# Altium PCB dev-board.PcbDoc (part 1 of 2)
Units mil, origin at the board's own origin, x right, y up, seen from the top; angles counter-clockwise.
Board outline 5607.36 x 5449.25 mil, 4 copper layers (Top Layer, Mid Layer 1, Mid Layer 2, Bottom Layer), stack 62.449 mil thick; 258 components, 114 nets, 705 pads, 139 vias.
Unrouted connection lines stored in the file: 225.
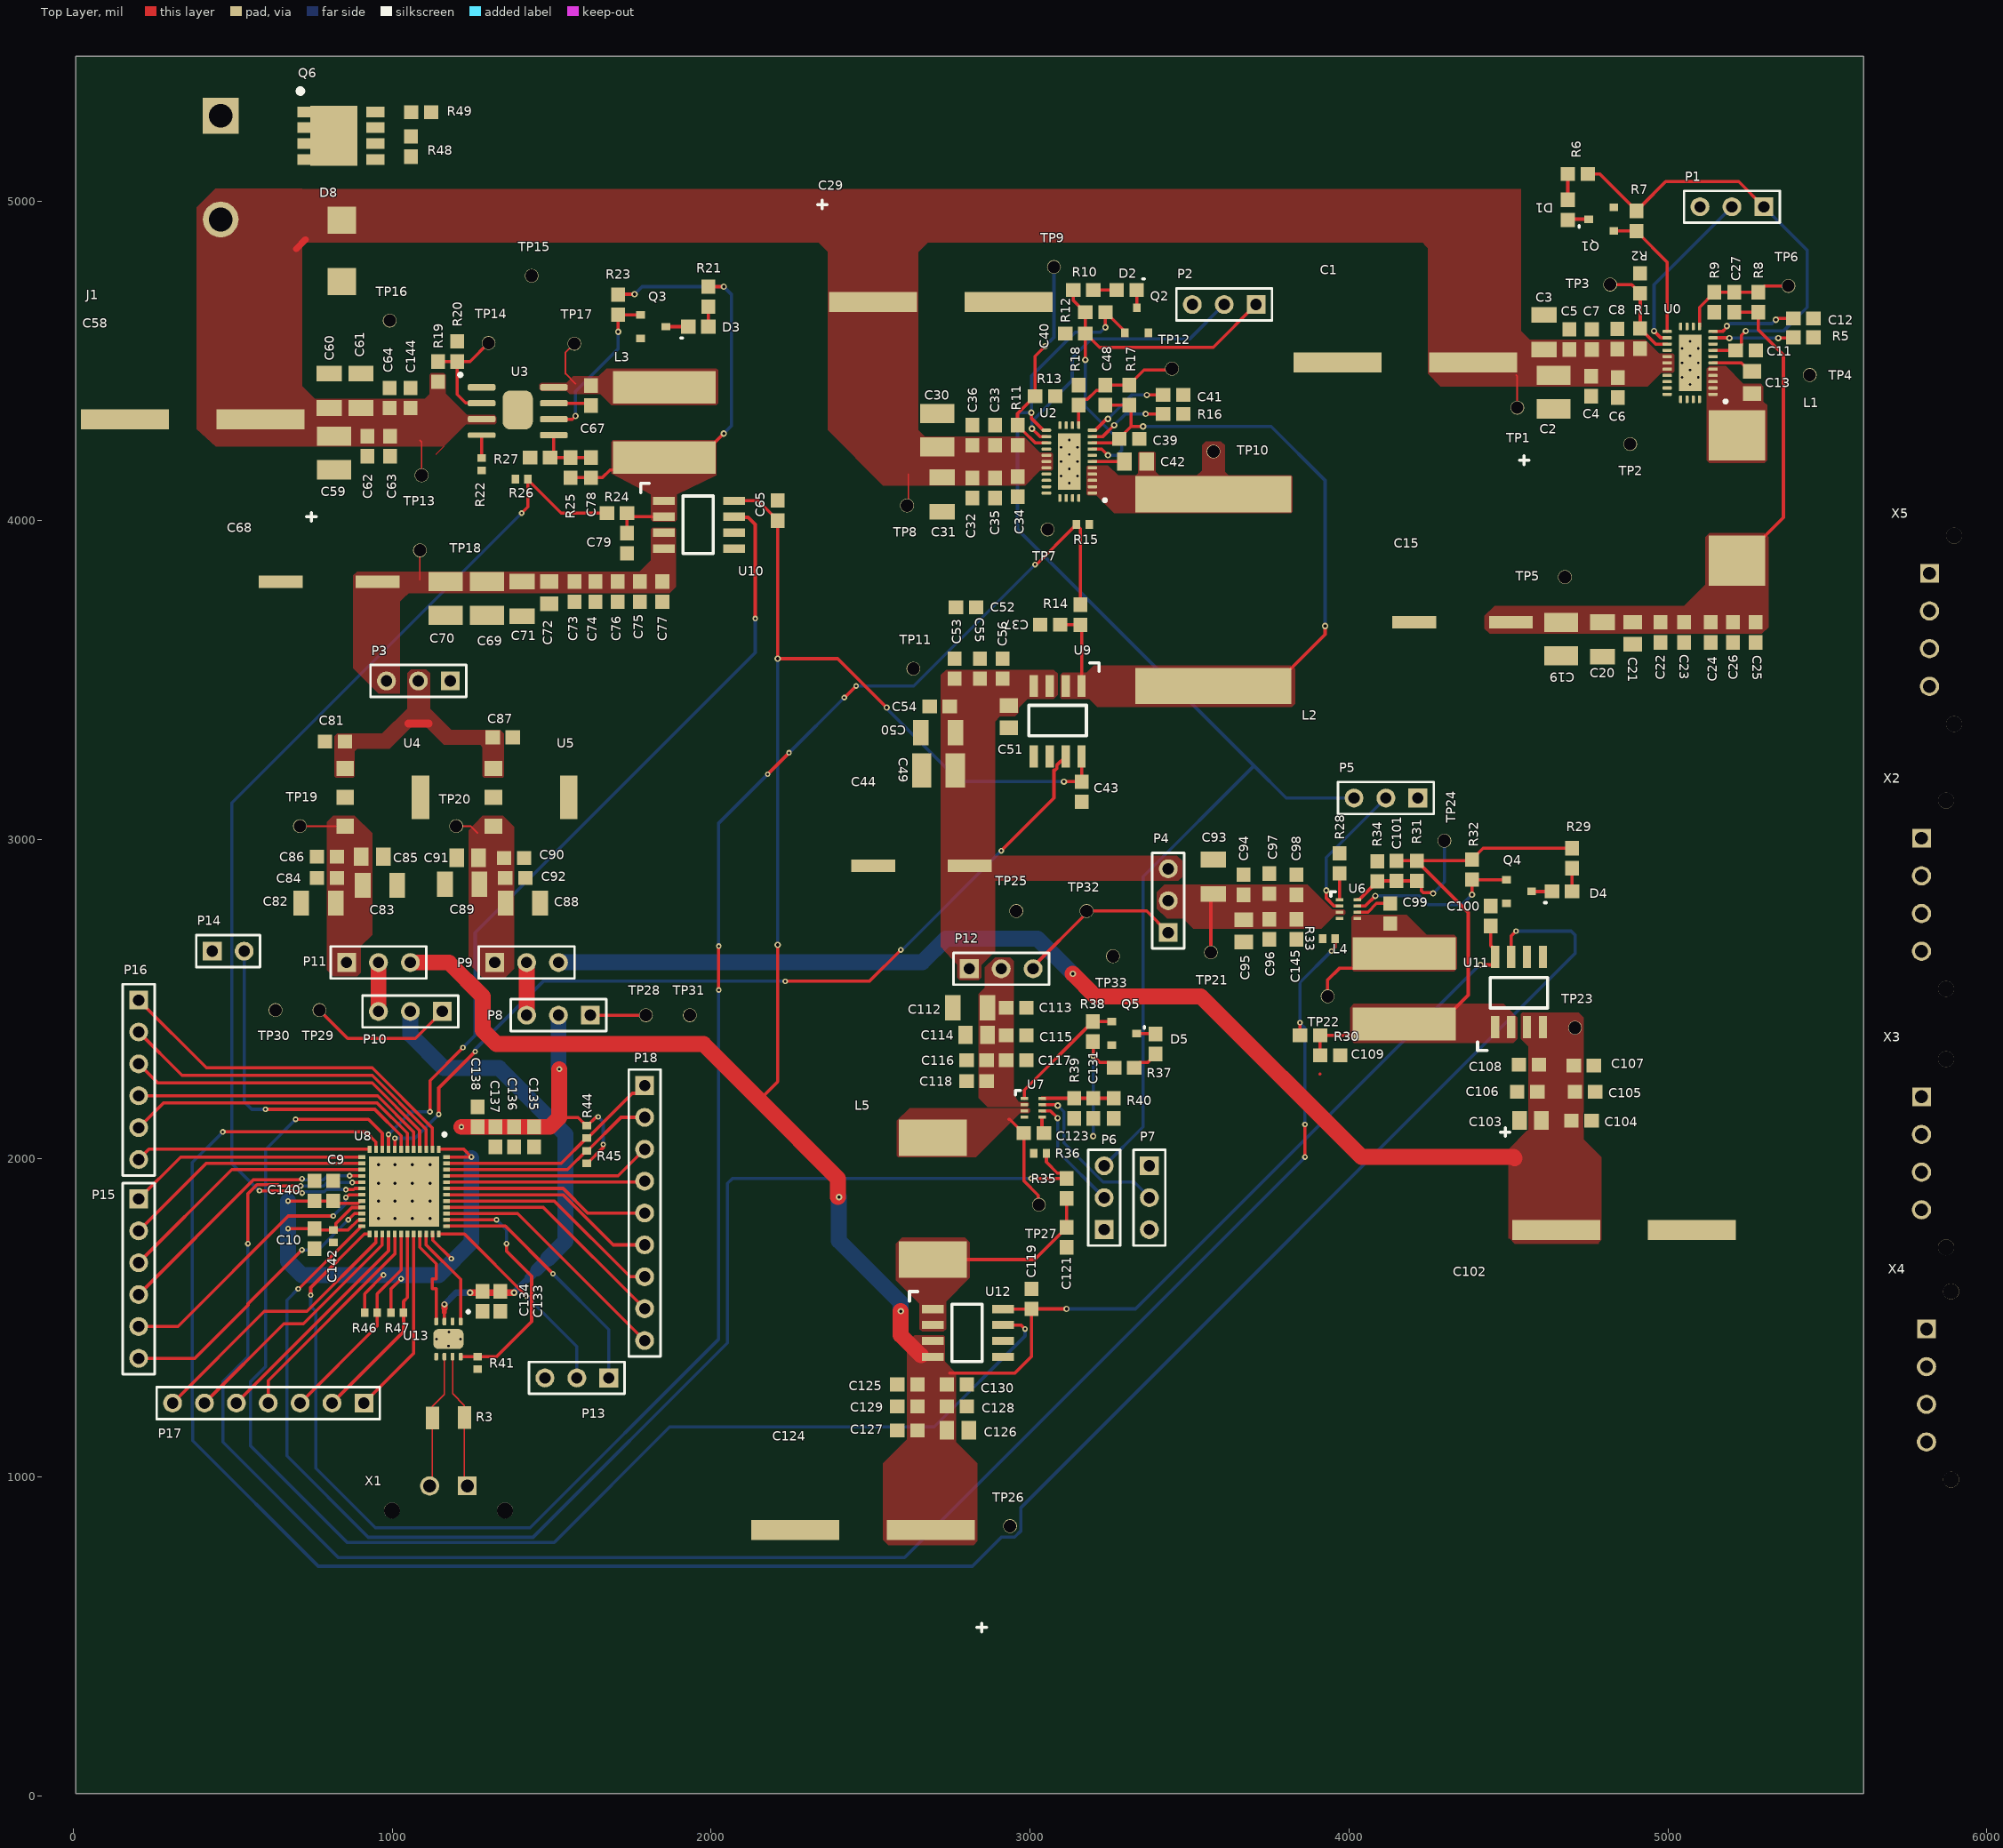
[diagram p0: Top Layer view]
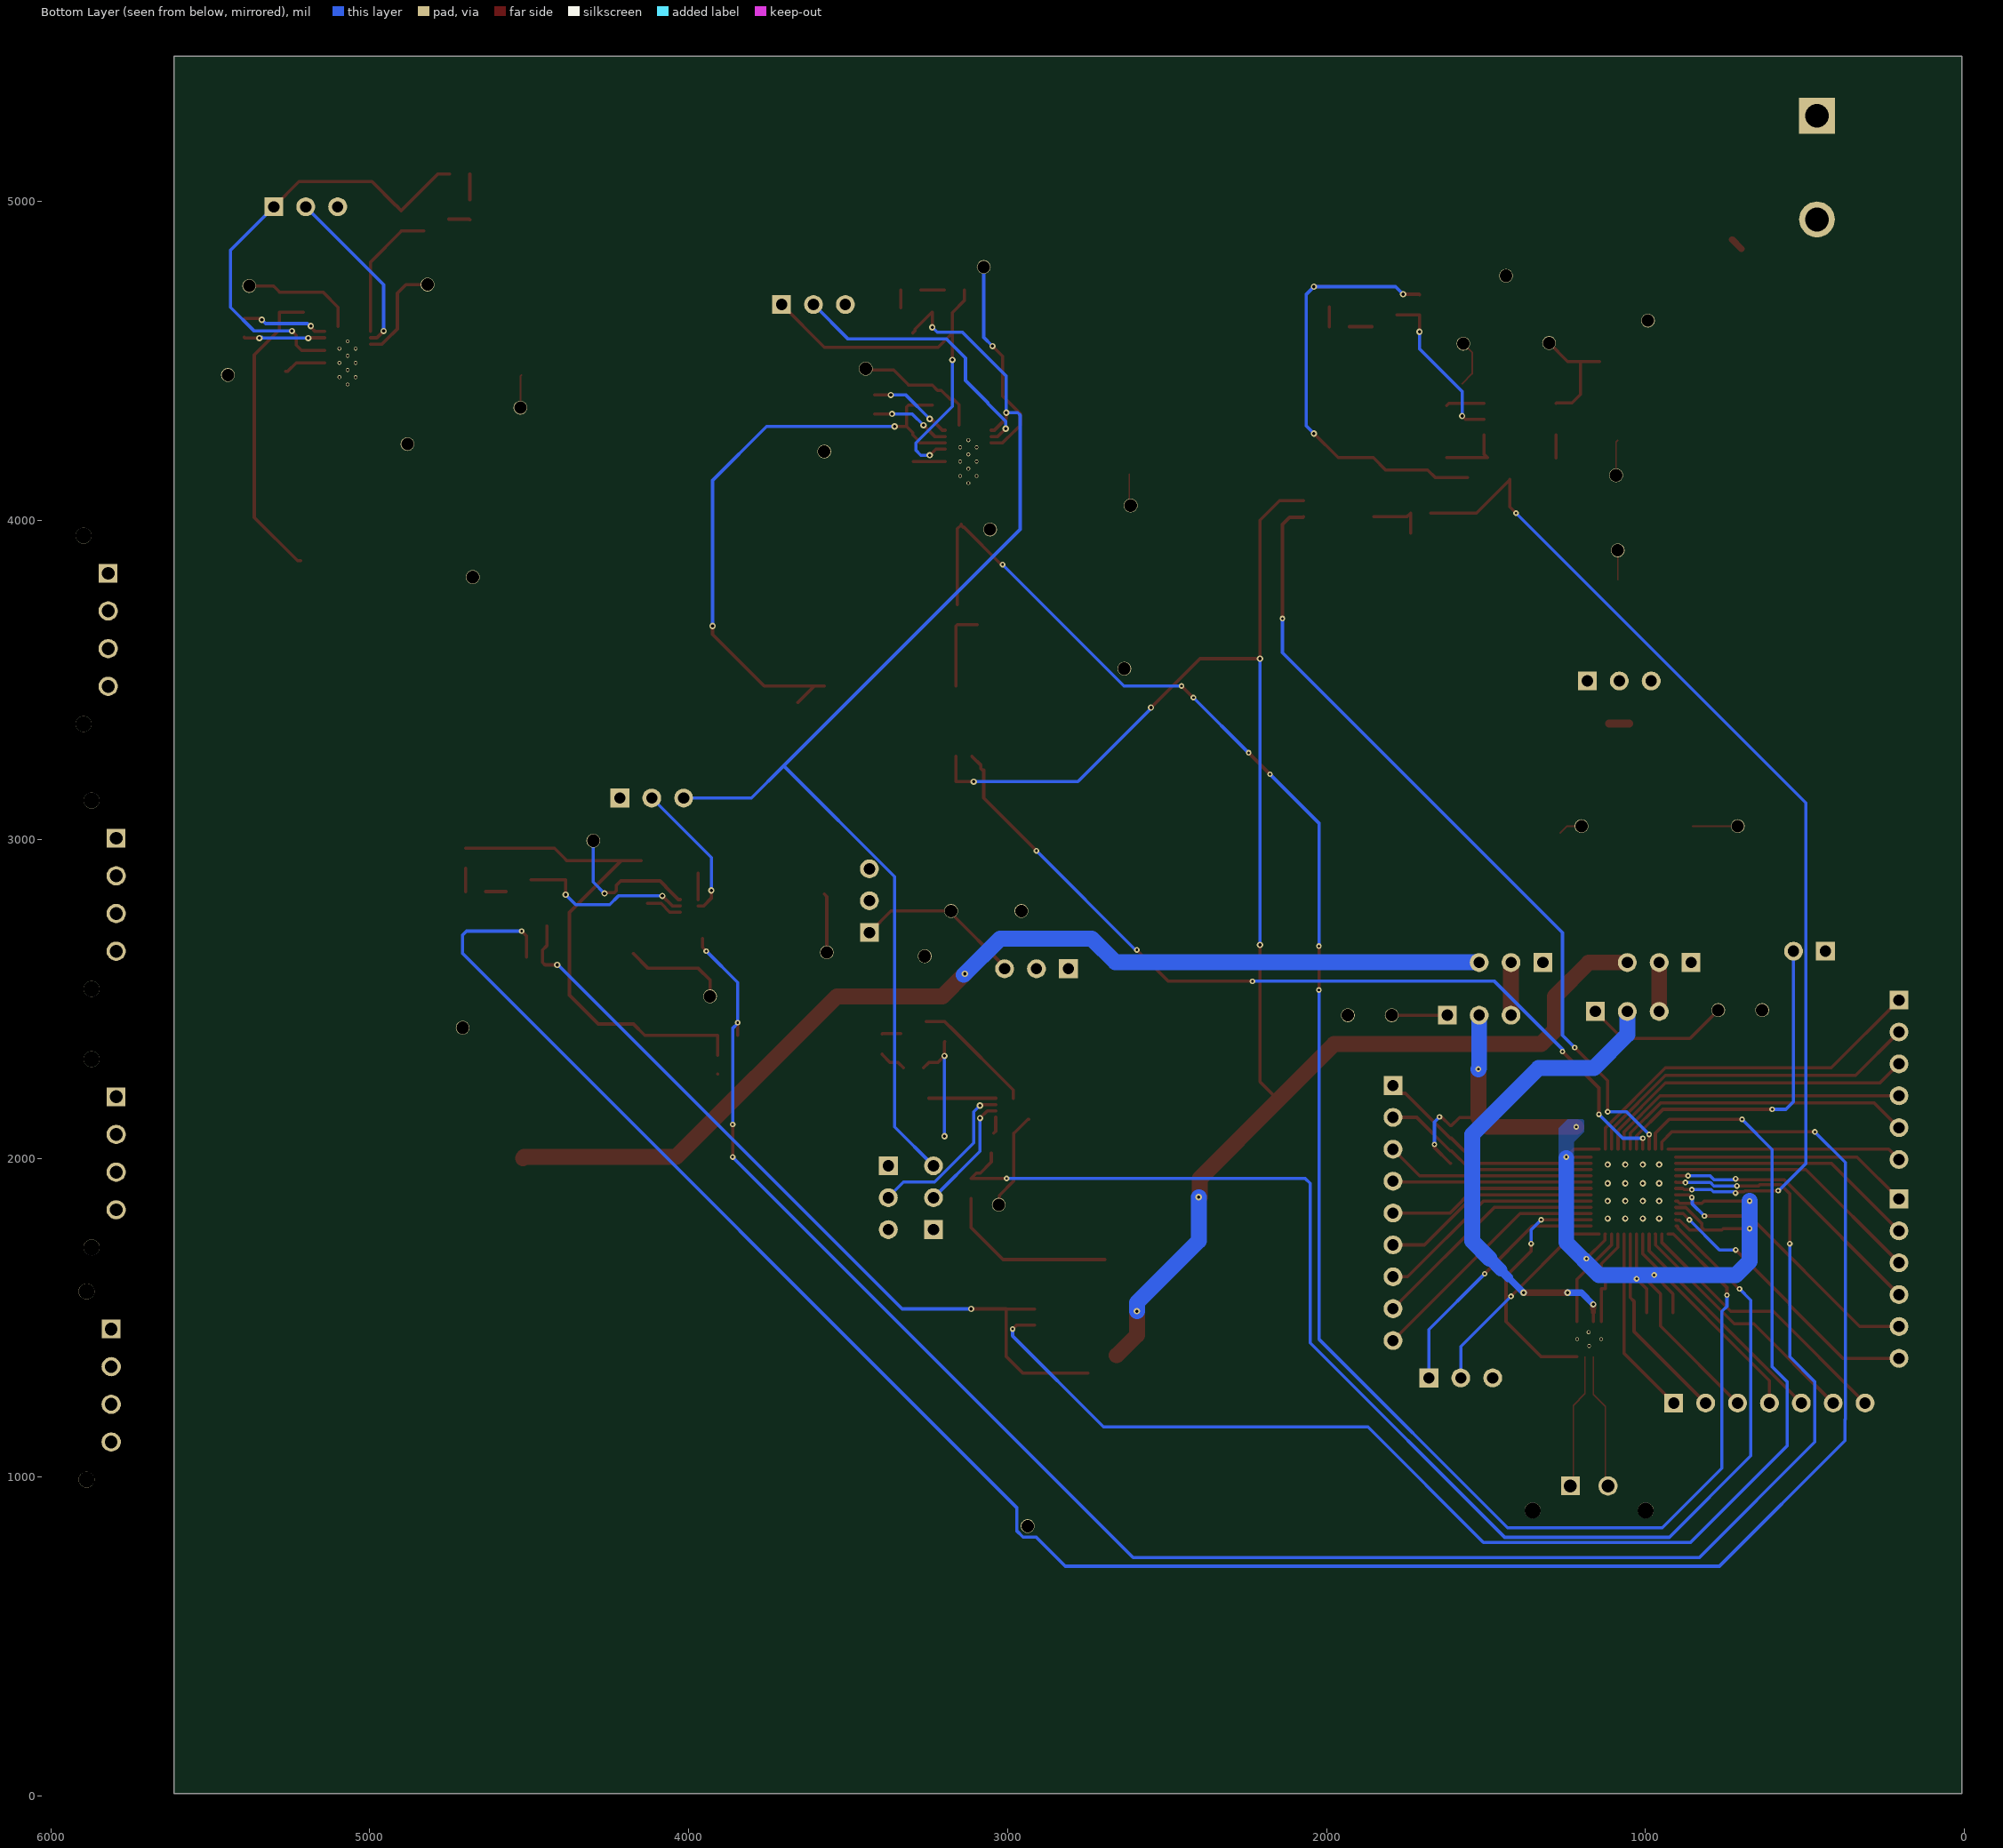
[diagram p1: Bottom Layer view, seen from below]

## Layer stack, top to bottom
Top Solder: solder mask 0.5, Solder Resist, Dk 3.8
Top Layer: signal copper 1.378
Dielectric 1: prepreg 8.2835, 7628, Dk 4.4
Mid Layer 1: signal copper 0.5984
Core: core 41.9291, FR-4, Dk 4.6
Mid Layer 2: signal copper 0.5984
Dielectric 2: prepreg 8.2835, 7628, Dk 4.4
Bottom Layer: signal copper 1.378
Bottom Solder: solder mask 0.5, Solder Resist, Dk 3.8

## Board outline
6.81,7.87 5614.17,7.87 5614.17,5457.13 6.81,5457.13

## Design rules (kind name [scope] priority, off if disabled: settings)
BoardOutlineClearance [All] p1: gap=7.87 ignorepadtopadclearanceinfootprint=FALSE
Clearance [All] p1: gap=4 ignorepadtopadclearanceinfootprint=FALSE except(5: Arc-Via Track-Via SMDPad-Via THPad-Via Via-Via Via-Fill Via-Poly Via-Region Via-Text; 9.84: Arc-Hole Track-Hole SMDPad-Hole THPad-Hole Via-Hole Fill-Hole Poly-Hole Region-Hole Text-Hole)
ComponentClearance [All] p1: gap=4 collisioncheckmode=3 verticalgap=4 showdistances=TRUE
DiffPairsRouting [All] p1: maxlimit=5 minlimit=5 mostfreqgap=5 toplayer_minwidth=3.72 toplayer_maxwidth=3.72 toplayer_prefwidth=3.72 midlayer1_minwidth=2.23 midlayer1_maxwidth=2.23 midlayer1_prefwidth=2.23 midlayer2_minwidth=2.23 midlayer2_maxwidth=2.23 midlayer2_prefwidth=2.23 bottomlayer_minwidth=3.72 bottomlayer_maxwidth=3.72 bottomlayer_prefwidth=3.72 impedanceprofiledriven=TRUE impedanceprofileid={BC63E812-B915-45A8-AD66-7DECBE9AC726} impedanceprofilevalue=120.000000 maxuncoupledlength=500
Height [All] p1: minheight=0 maxheight=71497.94 prefheight=500
HoleSize [All] p1: absolutevalues=TRUE maxlimit=248.03 minlimit=7.87 maxpercent=80.000 minpercent=20.000
HoleToHoleClearance [All] p1: gap=9.84 allowstackedmicrovias=FALSE
Length [InNetClass('CAN_MCU')] p1: maxlimit=466.36 minlimit=10
MatchedLengths [InNetClass('CAN_MCU')] p1: tolerance=0 checknetsindiffpair=FALSE checkdiffpairvsdiffpair=TRUE checkxsignals=TRUE checkothers=TRUE
MinimumAnnularRing [All] p1: minimumring=3
MinimumSolderMaskSliver [All] p1: minsoldermaskwidth=0
PlaneClearance [All] p1: clearance=4
PlaneConnect PlaneConnectPowerPads [InPadClass('PowerPads')] p1: planeconnectstyle=Direct reliefexpansion=20 reliefentries=4 reliefconductorwidth=10 reliefairgap=10
PlaneConnect [All] p2: planeconnectstyle=Direct reliefexpansion=11.81 reliefentries=4 reliefconductorwidth=4 reliefairgap=4
PolygonConnect PolygonConnectPowerPads [All vs (InPadClass('PowerPads'))] p1: connectstyle=Direct reliefconductorwidth=10 reliefentries=4 polygonreliefangle="90 Angle" airgapwidth=10
PolygonConnect [All] p2: connectstyle=Direct reliefconductorwidth=4 reliefentries=4 polygonreliefangle="90 Angle" airgapwidth=4
RoutingVias [All] p1: holewidth=7.87 width=17.72 viastyle="Through Hole" minholewidth=7.87 minwidth=17.72 maxholewidth=248.03 maxwidth=257.87
SilkToSilkClearance [All] p1: silktosilkclearance=0
SilkToSolderMaskClearance [IsPad] p1: minsilkscreentomaskgap=4 clearancetoexposedcopper=TRUE
SolderMaskExpansion [All] p1: expansion=2.95 istentingtop=FALSE
Width [All] p1: maxlimit=71497.94 minlimit=4 preferedwidth=4
20 further rules are at their usual default settings.

## Classes and differential pairs
component class Power-conn: D8 J1 Q6 R48 R49
component class can-stm32g4: C9 C10 C133 C134 C135 C136 C137 C138 C140 C142 P8 P9 P10 P11 P13 P14 P15 P16 P17 P18 R3 R41 R44 R45 R46 R47 TP28 TP29 TP30 TP31 U8 U13 X1
component class 24V-5A-buck: C1 C2 C3 C4 C5 C6 C7 C8 C11 C12 C13 C15 C19 C20 C21 C22 C23 C24 C25 C26 C27 D1 L1 P1 Q1 R1 R2 R5 R6 R7 R8 R9 TP1 TP2 TP3 TP4 TP5 TP6 U0 X2
component class 12V-5A-buck: C29 C30 C31 C32 C33 C34 C35 C36 C37 C39 C40 C41 C42 C43 C44 C48 C49 C50 C51 C52 C53 C54 C55 C56 D2 L2 P2 Q2 R10 R11 R12 R13 R14 R15 R16 R17 R18 TP7 TP8 TP9 TP10 TP11 TP12 U2 U9 X3
component class 12V-2A-buck: C58 C59 C60 C61 C62 C63 C64 C65 C67 C68 C69 C70 C71 C72 C73 C74 C75 C76 C77 C78 C79 C144 D3 L3 Q3 R19 R20 R21 R22 R23 R24 R25 R26 R27 TP13 TP14 TP15 TP16 TP17 TP18 U3 U10
component class 5V-buck: C112 C113 C114 C115 C116 C117 C118 C119 C121 C123 C124 C125 C126 C127 C128 C129 C130 C131 D5 L5 P6 P7 P12 Q5 R35 R36 R37 R38 R39 R40 TP25 TP26 TP27 TP33 U7 U12 X5
component class 5V-and-3V3-ldo: C81 C82 C83 C84 C85 C86 C87 C88 C89 C90 C91 C92 P3 TP19 TP20 U4 U5
component class 3V3-buck: C93 C94 C95 C96 C97 C98 C99 C100 C101 C102 C103 C104 C105 C106 C107 C108 C109 C145 D4 L4 P4 P5 Q4 R28 R29 R30 R31 R32 R33 R34 TP21 TP22 TP23 TP24 TP32 U6 U11 X4
differential pair CAN: +CAN_P -CAN_N

## Components (designator, comment, footprint, x,y, rotation, side; value= is the part's Value field where it differs from the comment)
C1 "100SEV100M12.5X16" ELEC-100U-0001 4177.17,4496.06 r270 top
C2 "C3225X7R1N106K250AC" CAP-1210 4641.54,4403.23 r270 top
C3 "CL31B105KCHNNNE" "CAP-1206 - duplicate" 4611.54,4585.87 r90 top
C4 "CC0603KRX7R0BB104" CAP-0603 4759.84,4421.26 r270 top
C5 "C1608C0G2A103J080AC" CAP-0603 4691.54,4568.23 r90 top
C6 "C0603Y102K1RAC7867" CAP-0603 4842.52,4417.32 r270 top
C7 "0603N101J101CT" CAP-0603 4761.54,4568.23 r90 top
C8 "0603N100J500CT" CAP-0603 4841.54,4569.41 r90 top
C9 "UMK107AB7105KA-T" CAP-0603 814.96,1897.64 r90 top
C10 "UMK107AB7105KA-T" CAP-0603 755.91,1748.03 r270 top
C11 "UMK107BBJ225KA-T" CAP-0603 5244.09,4533.98 r0 top
C12 "CC0603KRX7R9BB333" CAP-0603 5425.2,4633.86 r0 top
C13 "KAM21KR72A474KL" CAP-0805 5263.78,4433.07 r90 top
C15 "50TZV220M10X10.5" ELEC-220U-0003 4356.3,3681.1 r90 top
C19 "C3225X7R1N106K250AC" CAP-1210 4665.35,3628.31 r270 top
C20 "CL31B105KCHNNNE" "CAP-1206 - duplicate" 4795.28,3631.97 r270 top
C21 "KAM21KR72A474KL" CAP-0805 4889.76,3646.46 r270 top
C22 "CC0603KRX7R0BB104" CAP-0603 4976.38,3649.61 r270 top
C23 "C1608C0G2A103J080AC" CAP-0603 5051.18,3649.61 r270 top
C24 "C0603Y102K1RAC7867" CAP-0603 5133.86,3649.61 r270 top
C25 "0603N101J101CT" CAP-0603 5275.59,3649.61 r270 top
C26 "0603N100J500CT" CAP-0603 5204.72,3649.61 r270 top
C27 "885012006087" CAP-0603 5208.66,4685.04 r90 top
C29 "100SEV100M12.5X16" ELEC-100U-0001 2720.47,4685.04 r90 top
C30 "C3225X7R1N106K250AC" CAP-1210 2708.66,4283.46 r90 top
C31 "CL31B105KCHNNNE" "CAP-1206 - duplicate" 2724.41,4086.61 r270 top
C32 "CC0603KRX7R0BB104" CAP-0603 2818.9,4102.36 r270 top
C33 "C1608C0G2A103J080AC" CAP-0603 2889.76,4267.72 r90 top
C34 "C0603Y102K1RAC7867" CAP-0603 2960.63,4106.3 r270 top
C35 "0603N101J101CT" CAP-0603 2889.76,4102.36 r270 top
C36 "0603N100J500CT" CAP-0603 2818.9,4267.72 r90 top
C37 "CC0603KRX7R0BB104" CAP-0603 3062.99,3673.23 r180 top
C39 "UMK107AB7105KA-T" CAP-0603 3311.02,4255.91 r0 top
C40 "UMK107BBJ225KA-T" CAP-0603 3141.73,4586.61 r180 top
C41 "CC0603KRX7R9BB333" CAP-0603 3448.82,4393.7 r0 top
C42 "KAM21KR72A474KL" CAP-0805 3330.71,4185.04 r180 top
C43 "CC0603KRX7R0BB104" CAP-0603 3161.61,3149.61 r270 top
C44 "50TZV220M10X10.5" ELEC-220U-0003 2659.45,2917.32 r90 top
C48 "885012006087" CAP-0603 3236.22,4393.7 r90 top
C49 "C3225X7R1N106K250AC" CAP-1210 2712.6,3216.54 r180 top
C50 "CL31B105KCHNNNE" "CAP-1206 - duplicate" 2716.54,3334.65 r180 top
C51 "KAM21KR72A474KL" CAP-0805 2933.07,3385.04 r270 top
C52 "CC0603KRX7R0BB104" CAP-0603 2799.21,3728.35 r0 top
C53 "C1608C0G2A103J080AC" CAP-0603 2763.78,3535.43 r90 top
C54 "C0603Y102K1RAC7867" CAP-0603 2716.54,3417.32 r180 top
C55 "0603N101J101CT" CAP-0603 2842.52,3535.43 r90 top
C56 "0603N100J500CT" CAP-0603 2913.39,3535.43 r90 top
C58 "100SEV100M12.5X16" ELEC-100U-0001 374.21,4317.99 r270 top
C59 "GRM32EC72A106KE05L" CAP-1210 816.81,4212.13 r270 top
C60 "CL31B225KCHSNNE" CAP-1206 801.81,4407.13 r90 top
C61 "CL31B105KCHNNNE" "CAP-1206 - duplicate" 901.81,4402.13 r90 top
C62 "CC0603KRX7R0BB104" CAP-0603 921.81,4233.43 r270 top
C63 "0603N101J101CT" CAP-0603 992.91,4233.43 r270 top
C64 "7447798111" CAP-0603 991.81,4384.49 r90 top
C65 "CC0603KRX7R0BB104" CAP-0603 2208.66,4031.5 r90 top
C67 "CC0603KRX7R0BB104" CAP-0603 1623.31,4392.13 r90 top
C68 "50TZV220M10X10.5" ELEC-220U-0003 801.81,3808.62 r90 top
C69 "CL32B226KAJNNNE" CAP-1210 1296.81,3755.83 r270 top
C70 "C3225X7R1N106K250AC" CAP-1210 1166.81,3755.83 r270 top
C71 "CL31B105KCHNNNE" "CAP-1206 - duplicate" 1406.81,3759.49 r270 top
C72 "KAM21KR72A474KL" CAP-0805 1491.81,3773.98 r270 top
C73 "CC0603KRX7R0BB104" CAP-0603 1571.81,3777.13 r270 top
C74 "C1608C0G2A103J080AC" CAP-0603 1636.81,3777.13 r270 top
C75 "C0603Y102K1RAC7867" CAP-0603 1776.81,3777.13 r270 top
C76 "0603N101J101CT" CAP-0603 1706.81,3777.13 r270 top
C77 "0603N100J500CT" CAP-0603 1846.81,3777.13 r270 top
C78 "885012006087" CAP-0603 1623.31,4166.02 r90 top
C79 "CC0603KRX7R0BB104" CAP-0603 1736.22,3929.13 r270 top
C81 "CGA3E3X7R1H334K080AB" CAP-0603 820.31,3307.13 r180 top
C82 "CL31B106KBHNNNE" CAP-1206 768.7,2800.59 r180 top
C83 "CL31B106KBHNNNE" CAP-1206 961.61,2855.71 r0 top
C84 "UMK107AB7105KA-T" CAP-0603 795.28,2879.33 r180 top
C85 "KAM21KR72A474KL" CAP-0805 937.01,2946.26 r180 top
C86 "CC0603KRX7R0BB104" CAP-0603 795.28,2946.26 r180 top
C87 "CGA3E3X7R1H334K080AB" CAP-0603 1346.46,3320.28 r0 top
C88 "CL31B106KBHNNNE" CAP-1206 1409.45,2800.59 r0 top
C89 "CL31B106KBHNNNE" CAP-1206 1219.49,2859.65 r180 top
C90 "UMK107AB7105KA-T" CAP-0603 1381.89,2942.32 r0 top
C91 "KAM21KR72A474KL" CAP-0805 1236.22,2942.32 r0 top
C92 "CC0603KRX7R0BB104" CAP-0603 1385.83,2879.33 r0 top
C93 "CL31B106KBHNNNE" CAP-1206 3574.8,2882.87 r90 top
C94 "UMK107AB7105KA-T" CAP-0603 3669.8,2857.87 r90 top
C95 "KAM21KR72A474KL" CAP-0805 3669.8,2712.87 r270 top
C96 "C1608C0G2A103J080AC" CAP-0603 3749.8,2717.87 r270 top
C97 "CC0603KRX7R0BB104" CAP-0603 3749.8,2861.38 r90 top
C98 "0603N101J101CT" CAP-0603 3834.8,2857.87 r90 top
C99 "CC0603KRX7R0BB104" CAP-0603 4129.92,2767.72 r270 top
C100 "CC0603KRX7R0BB104" CAP-0603 4444.88,2759.84 r90 top
C101 "7447798111" CAP-0603 4148.31,2901.38 r270 top
C102 "100SEV100M12.5X16" ELEC-100U-0001 4862.2,1775.59 r90 top
C103 "KAM21KR72A474KL" CAP-0805 4569.13,2118.35 r180 top
C104 "C0603Y102K1RAC7867" CAP-0603 4729.13,2118.35 r0 top
C105 "C1608C0G2A103J080AC" CAP-0603 4740.16,2208.66 r0 top
C106 "CC0603KRX7R0BB104" CAP-0603 4559.06,2208.66 r180 top
C107 "0603N101J101CT" CAP-0603 4736.22,2291.34 r0 top
C108 "7447798111" CAP-0603 4564.13,2293.35 r180 top
C109 "CC0603KRX7R0BB104" CAP-0603 3940.94,2322.83 r0 top
C112 "CL31B106KBHNNNE" CAP-1206 2812.13,2472.09 r180 top
C113 "UMK107AB7105KA-T" CAP-0603 2956.69,2472.44 r0 top
C114 "KAM21KR72A474KL" CAP-0805 2832.13,2387.09 r180 top
C115 "C1608C0G2A103J080AC" CAP-0603 2956.69,2385.83 r0 top
C116 "CC0603KRX7R0BB104" CAP-0603 2832.13,2307.09 r180 top
C117 "C0603Y102K1RAC7867" CAP-0603 2956.69,2307.09 r0 top
C118 "0603N101J101CT" CAP-0603 2832.13,2242.09 r180 top
C119 "CC0603KRX7R0BB104" CAP-0603 3003.94,1559.06 r90 top
C121 "CC0603KRX7R0BB104" CAP-0603 3114.17,1751.97 r270 top
C123 "CC0603KRX7R0BB104" CAP-0603 3011.81,2078.74 r180 top
C124 "100SEV100M12.5X16" ELEC-100U-0001 2476.38,834.65 r270 top
C125 "7447798111" CAP-0603 2615.28,1290.67 r180 top
C126 "KAM21KR72A474KL" CAP-0805 2773.43,1146.77 r0 top
C127 "C0603Y102K1RAC7867" CAP-0603 2615.28,1146.77 r180 top
C128 "C1608C0G2A103J080AC" CAP-0603 2770.28,1222.13 r0 top
C129 "CC0603KRX7R0BB104" CAP-0603 2615.28,1222.13 r180 top
C130 "0603N101J101CT" CAP-0603 2770.28,1290.67 r0 top
C131 "7447798111" CAP-0603 3197.95,2156.77 r90 top
C133 "TMK107BBJ475KA-T" CAP-0603 1338.58,1551.18 r270 top
C134 "CC0603KRX7R0BB104" CAP-0603 1283.46,1551.18 r270 top
C135 "TMK107BBJ475KA-T" CAP-0603 1444.88,2066.93 r270 top
C136 "CC0603KRX7R0BB104" CAP-0603 1381.89,2066.93 r270 top
C137 "CC0603KRX7R0BB104" CAP-0603 1322.83,2066.93 r270 top
C138 "CC0603KRX7R0BB104" CAP-0603 1267.72,2129.92 r90 top
C140 "CC0603KRX7R0BB104" CAP-0603 755.91,1897.64 r90 top
C142 "CC0402KRX7R0BB103" CAP-0402 814.96,1755.91 r270 top
C144 "C0603Y102K1RAC7867" CAP-0603 1056.81,4384.49 r90 top
C145 "C0603Y102K1RAC7867" CAP-0603 3834.8,2717.87 r270 top
D1 "150060AS75000" LED-0603 4686.22,4974.61 r270 top
D2 "150060AS75000" LED-0603 3302.8,4723.62 r0 top
D3 "150060AS75000" LED-0603 1959.8,4608.23 r180 top
D4 "150060AS75000" LED-0603 4668.31,2836.61 r180 top
D5 "150060AS75000" LED-0603 3393.7,2358.27 r90 top
D8 "SMBJE43CAH" "DO-214AA (SMBJ)" 841.81,4847.13 r270 top
J1 "1546927-2" CONN-1546927-2 461.81,5107.13 r0 top
L1 "SRP1270-100M" PWRIND-10U-0002 5216.54,4070.87 r270 top
L2 "IHLP6767GZER8R2M01" PWRIND-8.2U-0002 3574.8,3781.79 r270 top
L3 "SRN8040-6R8Y" PWRIND-6.8U-0001 1853.31,4307.76 r270 top
L4 "SRN8040-1R0Y" PWRIND-6.8U-0001 4173.23,2531.5 r270 top
L5 "SRR1240-3R3Y" PWRIND-3.3U-0003 2694.76,1873.27 r270 top
P1 "Header 3" HDR1X3 5300.79,4984.25 r180 top
P2 "Header 3" HDR1X3 3708.74,4677.72 r180 top
P3 "Header 3" HDR1X3 1181.81,3497.13 r180 top
P4 "Header 3" HDR1X3 3433.31,2707.87 r90 top
P5 "Header 3" HDR1X3 4215.75,3129.92 r180 top
P6 "Header 3" HDR1X3 3232.28,1776.38 r90 top
P7 "Header 3" HDR1X3 3374.02,1976.38 r270 top
P8 "Header 3" HDR1X3 1621.26,2448.82 r180 top
P9 "Header 3" HDR1X3 1321.26,2614.17 r0 top
P10 "Header 3" HDR1X3 1156.69,2460.63 r180 top
P11 "Header 3" HDR1X3 856.69,2614.17 r0 top
P12 "Header 3" HDR1X3 2809.45,2594.49 r0 top
P13 "Header 3" HDR1X3 1678.74,1311.02 r180 top
P14 "Header 2" HDR1X2 435.43,2649.61 r0 top
P15 "Header 6" HDR1X6 204.72,1872.44 r270 top
P16 "Header 6" HDR1X6 204.72,2496.06 r270 top
P17 "Header 7" HDR1X7 911.02,1232.28 r180 top
P18 "Header 9" HDR1X9 1791.34,2228.35 r270 top
Q1 "T2N7002AK,LM" NMOS-SOT23-3 4791.22,4945.51 r90 top
Q2 "T2N7002AK,LM" NMOS-SOT23-3 3334.29,4627.99 r0 top
Q3 "T2N7002AK,LM" NMOS-SOT23-3 1818.31,4608.23 r270 top
Q4 "T2N7002AK,LM" NMOS-SOT23-3 4533.31,2836.61 r270 top
Q5 "T2N7002AK,LM" NMOS-SOT23-3 3295.28,2391.73 r270 top
Q6 "TPH7R006PL,L1Q" NMOS-8PowerVDFN 726.81,5282.13 r270 top
R1 "RC0603FR-072M15L" RES-0603 4913.39,4570.87 r270 top
R2 "RC0603FR-07100KL" RES-0603 4913.39,4744.09 r90 top
R3 "CRGH1206F120R" RES-1206 1176.18,1185.04 r0 top
R5 "RC0603FR-0776K8L" RES-0603 5425.2,4574.8 r0 top
R6 "AC0603FR-10100RL" RES-0603 4717.72,5086.61 r180 top
R7 "RC0603FR-0710KP" RES-0603 4901.22,4939.61 r90 top
R8 "RC0603FR-07100KL" RES-0603 5283.46,4685.04 r90 top
R9 "RC0603FR-074K32L" RES-0603 5145.67,4685.04 r270 top
R10 "AC0603FR-10100RL" RES-0603 3166.89,4723.62 r0 top
R11 "RC0603FR-072M15L" RES-0603 2960.63,4267.72 r270 top
R12 "RC0603FR-0710KP" RES-0603 3204.72,4653.54 r180 top
R13 "RC0603FR-07100KL" RES-0603 3047.24,4389.76 r0 top
R14 "RC0603FR-0710KP" RES-0603 3157.48,3704.72 r90 top
R15 "TMP6431DECR" RES-0402 3165.35,3988.19 r180 top
R16 "RC0603FR-0776K8L" RES-0603 3448.82,4334.65 r0 top
R17 "RC0603FR-07100KL" RES-0603 3311.02,4393.7 r90 top
R18 "RC0603FR-079K09L" RES-0603 3152.56,4393.7 r90 top
R19 "ERJ-3EKF2003V" RES-0603 1143.31,4467.13 r90 top
R20 "RC0603FR-0710KP" RES-0603 1203.31,4530.63 r90 top
R21 "RT0603FRE131KL" RES-0603 1991.3,4702.17 r270 top
R22 "ERJ-2RKF1502X" RES-0402 1280.12,4177.13 r270 top
R23 "RC0603FR-07100KL" RES-0603 1708.31,4677.13 r270 top
R24 "RC0603FR-0710KP" RES-0603 1704.72,4023.62 r180 top
R25 "RC0603FR-07110KL" RES-0603 1558.31,4166.02 r90 top
R26 "TMP6431DECR" RES-0402 1405.51,4129.92 r180 top
R27 "RC0603FR-0710KP" RES-0603 1463.31,4197.52 r180 top
R28 "RC0603FR-079K09L" RES-0603 3970.75,2925.2 r90 top
R29 "AC0603FR-10100RL" RES-0603 4699.8,2940.94 r270 top
R30 "RC0603FR-0710KP" RES-0603 3877.95,2385.83 r180 top
R31 "RC0603FR-0730K9L" RES-0603 4213.31,2901.38 r270 top
R32 "AF0603FR-074K7L" RES-0603 4385.83,2905.51 r270 top
R33 "TMP6431DECR" RES-0402 3937.01,2688.98 r0 top
R34 "RC0603FR-0710KP" RES-0603 4088.31,2899.88 r90 top
R35 "RC0603FR-0710KP" RES-0603 3114.17,1905.51 r90 top
R36 "TMP6431DECR" RES-0402 3031.5,2015.75 r0 top
R37 "CRGCQ0603J220R" RES-0603 3295.28,2283.46 r0 top
R38 "RC0603FR-0710KP" RES-0603 3196.85,2397.64 r270 top
R39 "RC0603FR-0773K2L" RES-0603 3137.95,2156.77 r90 top
R40 "RC0603FR-0710KP" RES-0603 3262.95,2156.77 r270 top
R41 "RC0402FR-074K7P" RES-0402 1267.72,1358.27 r90 top
R44 "RC0402FR-074K7P" RES-0402 1610.24,2082.68 r90 top
R45 "RC0402FR-074K7P" RES-0402 1610.24,2003.94 r270 top
R46 "RC0402FR-074K7P" RES-0402 933.07,1515.75 r180 top
R47 "RC0402FR-074K7P" RES-0402 1015.75,1515.75 r180 top
R48 "ERJ-3EKF2003V" RES-0603 1059.06,5173.23 r90 top
R49 "RC0603FR-07100KL" RES-0603 1090.75,5280.31 r180 top
TP1 "5003" TEST-POINT-0001 4527.56,4354.33 r180 top
TP2 "5003" TEST-POINT-0001 4881.89,4240.16 r180 top
TP3 "5003" TEST-POINT-0001 4818.9,4740.16 r180 top
TP4 "5003" TEST-POINT-0001 5444.88,4456.69 r180 top
TP5 "5003" TEST-POINT-0001 4677.17,3822.83 r180 top
TP6 "5003" TEST-POINT-0001 5377.95,4736.22 r180 top
TP7 "5003" TEST-POINT-0001 3055.12,3972.44 r0 top
TP8 "5003" TEST-POINT-0001 2614.17,4047.24 r0 top
TP9 "5003" TEST-POINT-0001 3074.8,4795.28 r0 top
TP10 "5003" TEST-POINT-0001 3574.8,4216.54 r90 top
TP11 "5003" TEST-POINT-0001 2633.86,3535.43 r90 top
TP12 "5003" TEST-POINT-0001 3444.88,4476.38 r90 top
TP13 "5003" TEST-POINT-0001 1091.81,4142.13 r90 top
TP14 "5003" TEST-POINT-0001 1301.81,4557.13 r90 top
TP15 "5003" TEST-POINT-0001 1437.01,4767.72 r90 top
TP16 "5003" TEST-POINT-0001 992.13,4627.36 r90 top
TP17 "5003" TEST-POINT-0001 1570.87,4555.12 r90 top
TP18 "5003" TEST-POINT-0001 1086.61,3906.89 r90 top
TP19 "5003" TEST-POINT-0001 710.31,3041.57 r90 top
TP20 "5003" TEST-POINT-0001 1200.31,3041.57 r90 top
TP21 "5003" TEST-POINT-0001 3566.93,2645.67 r90 top
TP22 "5003" TEST-POINT-0001 3933.07,2507.87 r90 top
TP23 "5003" TEST-POINT-0001 4708.66,2409.45 r90 top
TP24 "5003" TEST-POINT-0001 4299.21,2996.06 r90 top
TP25 "5003" TEST-POINT-0001 2956.69,2775.59 r0 top
TP26 "5003" TEST-POINT-0001 2937.01,846.46 r0 top
TP27 "5003" TEST-POINT-0001 3027.56,1854.33 r0 top
TP28 "5003" TEST-POINT-0001 1795.28,2448.82 r0 top
TP29 "5003" TEST-POINT-0001 771.65,2464.57 r0 top
TP30 "5003" TEST-POINT-0001 633.86,2464.57 r0 top
TP31 "5003" TEST-POINT-0001 1933.07,2448.82 r0 top
TP32 "5003" TEST-POINT-0001 3177.17,2775.59 r90 top
TP33 "5003" TEST-POINT-0001 3259.84,2633.86 r90 top
U0 "LM76005RNPR" IC-30-WQFN(6x4) 5069.72,4494.61 r180 top
U2 "LM76005RNPR" IC-30-WQFN(6x4) 3123.03,4185.04 r180 top
U3 "LMR38020SDDAR" IC-8PowerSOIC 1393.31,4347.13 r270 top
U4 "UA78M05IDCYR" IC-SOT-223-4 970.31,3132.13 r0 top
U5 "UA78M33CDCYR" IC-SOT-223-4 1435.31,3132.13 r0 top
U6 "TPS62933ODRLR" IC-SOT583 3998.31,2781.38 r270 top
U7 "TPS563212DRLR" IC-SOT583 3009.76,2158.27 r270 top
U8 "STM32G431CBU6" MCU-UFQFPN48 1037.4,1895.51 r270 top
U9 "TMCS1108A4BQDR" IC-CURRENT-0001 3086.61,3370.67 r180 top
U10 "TMCS1108A4BQDR" IC-CURRENT-0001 1961.81,3987.13 r270 top
U11 "TMCS1108A4BQDR" IC-CURRENT-0001 4533.31,2521.38 r0 top
U12 "TMCS1108A4BQDR" IC-CURRENT-0001 2805,1452.13 r270 top
U13 "TCAN1042HGDRBTQ1" IC-8-VSON 1176.18,1433.07 r270 top
X1 "Molex 43650-0215" 43650-0215 1176.18,972.44 r0 top
X2 "Molex 43650-0415" 43650-0415 5795.26,2826.77 r90 top
X3 "Molex 43650-0415" 43650-0415 5795.26,2015.74 r90 top
X4 "Molex 43650-0415" 43650-0415 5811.02,1287.4 r90 top
X5 "Molex 43650-0415" 43650-0415 5820.47,3657.48 r90 top

## Footprints (in the part's own frame and the unit in brackets; to place one, negate y for a bottom-side part, rotate by r counter-clockwise, add the part's x,y. Pads: shape width x height; smd on the part's side, far side on the other; paste and mask are expansions set on the pad)
43650-0215 [mil]
  round 50 hole 50 unplated: 1(-177.17,-77.17) 1(177.17,-77.17)
  rect 58.33x58.33 / inner rect 60x60 / far side rect 58.33x58.33 hole 40.16: P$1(59.06,0)
  round 60.24 / inner round 60 / far side round 60.24 hole 40.16: P$2(-59.06,0)
  body extent -190,-97 190,123, height 395
43650-0415 [mil]
  round 50 hole 50 unplated: 1(-295.28,-77.17) 1(295.28,-77.17)
  rect 58.33x58.33 / inner rect 60x60 / far side rect 58.33x58.33 hole 40.16: P$1(177.17,0)
  round 60.24 / inner round 60 / far side round 60.24 hole 40.16: P$2(59.06,0) P$3(-59.06,0) P$4(-177.17,0)
  body extent -308,-97 308,123, height 395
CAP-0402 [mm]
  rect 0.6x0.7 smd: 1(-0.5,0) 2(0.5,0)
  body extent -0.5,-0.22 0.5,0.23, height 0.5
CAP-0603 [mm]
  rect 1.15x1.1 smd: 1(-0.8,0) 2(0.8,0)
  body extent -0.8,-0.45 0.8,0.45, height 0.8
CAP-0805 [mm]
  rect 1.16x1.47 smd: 1(-0.88,0) 2(0.88,0)
  body extent -1,-0.63 1,0.63, height 0.94
CAP-1206 [mm]
  rect 1.25x2 smd: 1(-1.375,0) 2(1.375,0)
  body extent -1.6,-0.8 1.6,0.8, height 1.5
"CAP-1206 - duplicate" [mm]
  rect 1.25x2 smd: 1(-1.248,0) 2(1.502,0)
  body extent -1.47,-0.8 1.73,0.8, height 1.5
CAP-1210 [mm]
  rect 1.53x2.72 smd: 1(-1.341,0) 2(1.341,0)
  body extent -1.6,-1.25 1.6,1.25, height 2.7
CONN-1546927-2 [mm]
  rect 2.85x2.85 hole 1.9: 1(0,4.127)
  round 2.85 hole 1.9: 2(0,-4.127)
  body extent -11.57,-8.85 4.49,8.85, height 14.99
"DO-214AA (SMBJ)" [mm]
  rect 2.16x2.26 smd: 1(-2.416,0) 2(2.484,0)
  body extent -2.72,-1.95 2.78,1.95, height 2.45
ELEC-100U-0001 [mm]
  rect 1.6x7 smd: 1(0,5.4) 2(0,-5.4)
  silkscreen extent 7.45,9.08 8.13,9.82, body extent -6.6,-7.15 6.6,7.15, height 16.56
ELEC-220U-0003 [mm]
  rect 1x3.5 smd: 1(0,-3.85) 2(0,3.85)
  body extent -5.25,-5.45 5.25,5.45, height 10.54
HDR1X2 [mm] "Connector; Header; 2 Position"
  rect 1.5x1.5 hole 0.9: 1(0,0)
  round 1.5 hole 0.9: 2(2.54,0)
  silkscreen extent -1.27,-1.27 3.81,1.27
HDR1X3 [mm] "Connector; Header; 3 Position"
  rect 1.5x1.5 hole 0.9: 1(0,0)
  round 1.5 hole 0.9: 2(2.54,0) 3(5.08,0)
  silkscreen extent -1.27,-1.27 6.35,1.27
HDR1X6 [mm] "Connector; Header; 6 Position"
  rect 1.5x1.5 hole 0.9: 1(0,0)
  round 1.5 hole 0.9: 2(2.54,0) 3(5.08,0) 4(7.62,0) 5(10.16,0) 6(12.7,0)
  silkscreen extent -1.27,-1.27 13.97,1.27
HDR1X7 [mm] "Connector; Header; 7 Position"
  rect 1.5x1.5 hole 0.9: 1(0,0)
  round 1.5 hole 0.9: 2(2.54,0) 3(5.08,0) 4(7.62,0) 5(10.16,0) 6(12.7,0) 7(15.24,0)
  silkscreen extent -1.27,-1.27 16.51,1.27
HDR1X9 [mm] "Connector; Header; 9 Position"
  rect 1.5x1.5 hole 0.9: 1(0,0)
  round 1.5 hole 0.9: 2(2.54,0) 3(5.08,0) 4(7.62,0) 5(10.16,0) 6(12.7,0) 7(15.24,0) 8(17.78,0) 9(20.32,0)
  silkscreen extent -1.27,-1.27 21.59,1.27
IC-8-VSON [mm]
  rrect50% 0.6x0.3 smd mask+0.07: 1(-1.4,0.975) 2(-1.4,0.325) 3(-1.4,-0.325) 4(-1.4,-0.975) 5(1.4,-0.975) 6(1.4,-0.325) 7(1.4,0.325) 8(1.4,0.975)
  rrect50% 1.6x2.4 smd: 9(0,0)
  silkscreen extent -2.27,1.49 -2.08,1.67, body extent -1.5,-1.5 1.5,1.5, height 1
IC-8PowerSOIC [mm]
  rrect50% 0.5x2.2 smd mask+0.07: 1(-1.8,-2.875) 2(-0.53,-2.875) 3(0.74,-2.875) 5(2.01,2.875) 6(0.74,2.875) 7(-0.53,2.875) 8(-1.8,2.875)
  rrect50% 0.45x2.2 smd mask+0.07: 4(2.01,-2.875)
  rrect50% 3.1x2.4 smd: 9(0,0)
  silkscreen extent -2.92,-4.7 -2.67,-4.45, body extent -2.35,-3 2.55,3, height 1.7
IC-30-WQFN(6x4) [mm] "30 pin WQFN with exposed pad"
  rrect50% 0.75x0.25 smd mask+0.07: 1(-1.825,2.5) 2(-1.825,2) 3(-1.825,1.5) 4(-1.825,1) 5(-1.825,0.5) 6(-1.825,0) 7(-1.825,-0.5) 8(-1.825,-1) 9(-1.825,-1.5) 10(-1.825,-2) 11(-1.825,-2.5) 16(1.825,-2.5) 17(1.825,-2) 18(1.825,-1.5) 19(1.825,-1) 20(1.825,-0.5) 21(1.825,0) 22(1.825,0.5) 23(1.825,1) 24(1.825,1.5) 25(1.825,2) 26(1.825,2.5)
  rrect50% 0.25x0.6 smd mask+0.07: 12(-0.75,-2.9) 13(-0.25,-2.9) 14(0.25,-2.9) 15(0.75,-2.9) 27(0.75,2.9) 28(0.25,2.9) 29(-0.25,2.9) 30(-0.75,2.9)
  rect 1.8x4.5 smd: 31(0,0)
  silkscreen extent -2.94,2.96 -2.71,3.19, body extent -2,-3 2,3, height 0.8
IC-CURRENT-0001 [mm]
  rect 0.65x1.75 smd: 1(-1.905,-2.8) 2(-0.635,-2.8) 3(0.635,-2.8) 4(1.905,-2.8) 5(1.905,2.8) 6(0.635,2.8) 7(-0.635,2.8) 8(-1.905,2.8)
  silkscreen extent -3.3,-4.65 2.29,1.14, body extent -2.45,-3.04 2.45,2.99, height 1.63
IC-SOT583 [mm]
  rect 0.25x0.6 smd: 1(-0.762,-0.7) 2(-0.262,-0.7) 3(0.238,-0.7) 4(0.738,-0.7) 5(0.738,0.7) 6(0.238,0.7) 7(-0.262,0.7) 8(-0.762,0.7)
  silkscreen extent -1.4,-1.4 -1.02,-1.02, body extent -1.11,-0.85 1.11,0.85, height 0.56
IC-SOT-223-4 [mm]
  rect 1.4x1.2 smd mask+0.07: 1(-3,2.3) 2(-3,0) 3(-3,-2.3)
  rect 1.4x3.5 smd: 2(3,0)
  body extent -3.5,-3.25 3.5,3.25, height 1.68
LED-0603 [mm]
  rect 1.15x1.1 smd: 1(-0.8,0) 2(0.8,0)
  silkscreen extent 1.27,0.89 1.4,0.89, body extent -0.8,-0.3 0.8,0.3, height 1
MCU-UFQFPN48 [mm] "STM32G431CBU6"
  rect 0.55x0.3 smd mask+0.07: 1(-3.375,2.75) 2(-3.375,2.25) 3(-3.375,1.75) 4(-3.375,1.25) 5(-3.375,0.75) 6(-3.375,0.25) 7(-3.375,-0.25) 8(-3.375,-0.75) 9(-3.375,-1.25) 10(-3.375,-1.75) 11(-3.375,-2.25) 12(-3.375,-2.75) 25(3.375,-2.75) 26(3.375,-2.25) 27(3.375,-1.75) 28(3.375,-1.25) 29(3.375,-0.75) 30(3.375,-0.25) 31(3.375,0.25) 32(3.375,0.75) 33(3.375,1.25) 34(3.375,1.75) 35(3.375,2.25) 36(3.375,2.75)
  rect 0.3x0.55 smd mask+0.07: 13(-2.75,-3.375) 14(-2.25,-3.375) 15(-1.75,-3.375) 16(-1.25,-3.375) 17(-0.75,-3.375) 18(-0.25,-3.375) 19(0.25,-3.375) 20(0.75,-3.375) 21(1.25,-3.375) 22(1.75,-3.375) 23(2.25,-3.375) 24(2.75,-3.375) 37(2.75,3.375) 38(2.25,3.375) 39(1.75,3.375) 40(1.25,3.375) 41(0.75,3.375) 42(0.25,3.375) 43(-0.25,3.375) 44(-0.75,3.375) 45(-1.25,3.375) 46(-1.75,3.375) 47(-2.25,3.375) 48(-2.75,3.375)
  rect 5.6x5.6 smd: 49(0,0)
  silkscreen extent -4.67,3.08 -4.43,3.33, body extent -3.56,-3.56 3.56,3.56, height 0.61
NMOS-8PowerVDFN [mm]
  rect 0.85x1.45 smd: 1(0,5.588) 2(1.27,5.588) 2(2.54,5.588) 2(3.81,5.588)
  rect 0.85x1.05 smd: 3(0,-0.112) 3(1.27,-0.112) 3(2.54,-0.112) 3(3.81,-0.112)
  rect 4.8x3.75 smd: 3(1.905,2.286)
  silkscreen extent -1.91,-0.64 -1.4,-0.13
NMOS-SOT23-3 [mm]
  rect 0.6x0.7 smd: 1(-0.95,-1) 2(0.95,-1) 3(0,1)
  body extent -1.46,-1.18 1.46,1.19, height 1.12
PWRIND-3.3U-0003 [mm]
  rect 2.9x5.4 smd: 1(-4.85,0) 2(4.85,0)
  body extent -6.4,-6.4 6.4,6.4, height 4.5
PWRIND-6.8U-0001 [mm]
  rect 2.6x8.2 smd: 1(-2.8,0) 2(2.8,0)
  body extent -4,-4 4,4, height 4
PWRIND-8.2U-0002 [mm]
  rect 2.875x12.45 smd: 1(-7.642,0) 2(7.642,0)
  body extent -8.7,-8.71 8.47,8.46, height 6.89
PWRIND-10U-0002 [mm]
  rect 4x4.5 smd: 1(-5,0) 2(5,0)
  body extent -6.85,-6.45 6.85,6.45, height 7.06
RES-0402 [mm]
  rect 0.6x0.7 smd: 1(-0.5,0) 2(0.5,0)
  body extent -0.5,-0.25 0.5,0.25, height 0.3
RES-0603 [mm]
  rect 1.15x1.1 smd: 1(-0.8,0) 2(0.8,0)
  body extent -0.8,-0.4 0.8,0.4, height 0.43
RES-1206 [mm]
  rect 1.05x1.8 smd: 1(-1.275,0) 2(1.275,0.043)
  body extent -1.6,-0.77 1.6,0.82, height 0.55
TEST-POINT-0001 [mm] "2024 miniature test point"
  round 1.1 hole 1: 1(0,0)
  body extent -1.27,-1.27 1.27,1.27, height 4.57

## Part data
C1 C29 C58 C102 C124: library part ELEC-100U-0001, "100 µF 100 V Aluminum Electrolytic Capacitors Radial, Can - SMD 2000 Hrs @ 85°C", Capacitance="100 uF", Manufacturer=Rubycon, Tolerance="+/- 20%", Voltage="100 V", Assembled?=No
  C58 C102 C124: ESR="idk check the datasheet i couldnt find it"
C2 C19 C30 C49 C70: library part CAP-10U-0004, "10 µF ±10% 75V Ceramic Capacitor X7R 1210 (3225 Metric)", Capacitance="10 uF", Voltage Rating=75V
C3 C20 C31 C50 C61 C71: library part CAP-1U-0001, "1 µF ±10% 100V Ceramic Capacitor X7R 1206 (3216 Metric)", Capacitance="1 uF", Voltage=100V
C4 C22 C32 C37 C43 C52 C62 C65 C73 C79 C86 C92 C97 C99 C100 C106 C109 C116 C119 C121 C123 C129: library part CAP-100N-0001, "CAP CER 0.1UF 100V X7R 0603", Capacitance=100nF, Manufacturer=YAGEO, Package Size=0603, Temperature Coefficient=X7R, Voltage Rating=100V, Assembled?=no, Manufacturer Part Number=CC0603KRX7R0BB104
C5 C23 C33 C53 C74 C96 C105 C115 C128: library part CAP-10N-0002, "CAP CER 10000PF 100V C0G 0603", Capacitance=10nF, Manufacturer="TDK Corporation", Package Size=0603, Temperature Coefficient=C0G/NP0, Voltage Rating=100V, Assembled?=no, Manufacturer Part Number=C1608C0G2A103J080AC
C6 C24 C34 C54 C75 C104 C117 C127 C145: library part CAP-1N-0001, "1000 pF ±10% 100V Ceramic Capacitor X7R 0603 (1608 Metric)", Capacitance="1 nF", Voltage=100V
C7 C25 C35 C55 C63 C76 C98 C107 C118 C130: library part CAP-100P-0002, "100 pF ±5% 100V Ceramic Capacitor C0G, NP0 0603 (1608 Metric)", Capacitance="100 pF", Package Size=0603, Temp Coeff=C0G/NP0, Tolerance=+/-5%, Voltage=100V
C8 C26 C36 C56 C77: library part CAP-10P-0001, "10 pF ±5% 50V Ceramic Capacitor C0G, NP0 0603 (1608 Metric)", Capacitance="10 pF", Manufacturer="Walshin Technology Corporation", Package Size=0603, Temperature Coefficient="C0G, NP0", Voltage Rating=50V, Assembled?=Yes, Manufacturer Part Number=0603N100J500CT
C9 C10 C39 C84 C90 C94 C113: library part CAP-1U-0002, "1 µF ±10% 50V Ceramic Capacitor X7R 0603 (1608 Metric)", Capacitance="1 uF", Package Size=0603, Voltage=50V
C11 C40: library part CAP-2.2U-0001, "2.2 µF ±10% 50V Ceramic Capacitor X5R 0603 (1608 Metric)", Capacitance="2.2 uF", oltage=50V
C12 C41: library part CAP-33N-0001, "0.033 µF ±10% 50V Ceramic Capacitor X7R 0603 (1608 Metric)", Capacitance=33nF, Manufacturer=YAGEO, Package Size=0603, Temperature Coefficient=X7R, Voltage Rating=50V, Assembled?=no, Manufacturer Part Number=CC0603KRX7R9BB333
C13 C21 C42 C51 C72 C85 C91 C95 C103 C114 C126: library part CAP-0.47U-0001, "0.47 µF ±10% 100V Ceramic Capacitor X7R 0805 (2012 Metric)", Capacitance="0.47 uF", Package Size=0805, Temperature Coefficient=X7R, Tolerance="+/- 10%", Voltage=100V, Assembled?=No
C15 C44 C68: library part ELEC-220U-0003, "220 µF 50 V Aluminum Electrolytic Capacitors Radial, Can - SMD 2000 Hrs @ 105°C", Capacitance="220 uF", Voltage Rating=50V, Size=.406inx.406in*.413in
C27 C48 C78: library part CAP-1P-0001, "1 pF ±0.25pF 100V Ceramic Capacitor C0G, NP0 0603 (1608 Metric)", Capacitance="1 pF", Package Size=0603, Temperature Coefficient=C0G/NP0, Tolerance="+/- 0.25 pF", Voltage=100V, Assembled?=No
C59: library part CAP-10U-0003, "10 µF ±10% 100V Ceramic Capacitor X7S 1210 (3225 Metric)", Package Size=1210, Voltage Rating=100V, Capcitance="10 uF"
C60: library part CAP-2.2U-0003, "2.2 µF ±10% 100V Ceramic Capacitor X7R 1206 (3216 Metric)", Capacitance="2.2 uF", Manufacturer="Samsung Electro-Mechanics", Package Size=1206, Temperature Coefficient=X7R, Tolerance="+/- 10%", Voltage=100V, Assembled?=No, Manufacturer Part Number=CL31B225KCHSNNE
C64 C101 C108 C125 C131: library part CAP-47P-0001, "47 pF ±5% 100V Ceramic Capacitor C0G, NP0 0603 (1608 Metric)", Capacitance="47 pF", Voltage Rating=100V
C67 C134 C136 C137 C138 C140: library part CAP-100N-0001, "CAP CER 0.1UF 100V X7R 0603", Capacitance="100nF +/-10%", Manufacturer=YAGEO, Package Size=0603, Temperature Coefficient=X7R, Voltage Rating=100V, Assembled?=no, Manufacturer Part Number=CC0603KRX7R0BB104
C69: library part CAP-22U-0003, "22 µF ±10% 25V Ceramic Capacitor X7R 1210 (3225 Metric)", Capacitance="22 uF", Package Size=1210, Temperature Coefficient=X7R, Tolerance="+/- 10%", Voltage=25V, Assembled?=No
C81 C87: library part CAP-0.33uF-0001, "0.33 µF ±10% 50V Ceramic Capacitor X7R 0603 (1608 Metric)", Capacitance="0.33 uF", Manufacturer="TDK Corporation", Temperature Coefficient=X7R, Tolerance="+/- 10%", Voltage=50V, Manufacturer Part Number=CGA3E3X7R1H334K080AB
C82 C83 C88 C89 C93 C112: library part CAP-10U-0001, "10 µF ±10% 50V Ceramic Capacitor X7R 1206 (3216 Metric)", Capacitance=10uF, Manufacturer="Samsung Electro-Mechanics", Package Size=1206, Temperature Coefficient=X7R, Voltage Rating=50V, Assembled?=no, Manufacturer Part Number=CL31B106KBHNNNE
C133 C135: library part CAP-4.7U-0001, "4.7 µF ±10% 25V Ceramic Capacitor X5R 0603 (1608 Metric)", Capacitance="4.7uF +/-10%", Manufacturer="Taiyo Yuden", Package Size=0603, Temperature Coefficient=X5R, Voltage Rating=25V, Assembled?=no, Manufacturer Part Number=TMK107BBJ475KA-T
C142: library part CAP-10N-0001, "10000 pF ±10% 100V Ceramic Capacitor X7R 0402 (1005 Metric)", Capacitance="10nF +/-10%", Manufacturer=YAGEO, Package Size=0402, Temperature Coefficient=X7R, Voltage Rating=100V, Assembled?=no, Manufacturer Part Number=CC0402KRX7R0BB103
C144: library part CAP-1N-0001, "1000 pF ±10% 100V Ceramic Capacitor X7R 0603 (1608 Metric)", Capacitance="1 nF +/-10%", Voltage=100V
D1 D2 D3 D4 D5: library part LED_Amber_0001, "CAP CER 0.1UF 100V X7R 0603", Color=Amber, Current Rating=20mA, Manufacturer="Wurth Electronik", Package Size=0603, Assembled?=no, Manufacturer Part Number=150060AS75000, Vf=2V
D8: library part DIO-69.4V-0001, "69.4V Clamp 8.7A Ipp Tvs Diode Surface Mount DO-214AA (SMBJ)", Breakdown Voltage=47.8V, Package="DO-214AA (SMBJ)", Peak pulser current=8.7A, Reverse working maximum voltage=43V, Channels=Bidirectional, Vclamp=69.4V
J1: library part CON-2POS-0003
L1: library part PWRIND-10U-0002, "10 µH Shielded Drum Core, Wirewound Inductor 10 A 16.8mOhm Max Nonstandard", Inductance="10 uH", Tolerance="+/- 20%", Assembled?=No, DCI="10 A", DCR="16.8 mOhm", Isat=16A
L2: library part PWRIND-8.2U-0002, "8.2 µH Shielded Molded Inductor 18 A 10.66mOhm Max Nonstandard", Inductance="8.2 uH", Tolerance=+/-20%, DCI=18A, DCR="10.66 mOhm", Isat=25A
L3: library part PWRIND-6.8U-0001, "6.8 µH Semi-Shielded Drum Core, Wirewound Inductor 3.9 A 33mOhm Max Nonstandard", Inductance="6.8 uH", Tolerance=30%, Assembled?=No, DCI=3.9A, DCR="33 mOhm", Isat=4.2A
L4: library part PWRIND-1U-0001, "1 µH Semi-Shielded Drum Core, Wirewound Inductor 7.8 A 10mOhm Max Nonstandard", Inductance="1 uH", Tolerance=30%, Assembled?=No, DCI=7.8A, DCR="10 mOhm", Isat=11A
L5: library part PWRIND-3.3U-0003, "3.3 µH Shielded Drum Core, Wirewound Inductor 6.8 A 15mOhm Max Nonstandard", Inductance="3.3 uH", Tolerance=30%, Assembled?=No, DCI="6.8 A", DCR="15 mOhm", Isat=6.5A
P1 P2 P3 P4 P5 P6 P7 P8 P9 P10 P11 P12 P13: "Header, 3-Pin", LatestRevisionDate=17-Jul-2002, LatestRevisionNote="Re-released for DXP Platform.", Publisher="Altium Limited"
P14: "Header, 2-Pin", LatestRevisionDate=17-Jul-2002, LatestRevisionNote="Re-released for DXP Platform.", Publisher="Altium Limited"
P15 P16: "Header, 6-Pin", LatestRevisionDate=17-Jul-2002, LatestRevisionNote="Re-released for DXP Platform.", Publisher="Altium Limited"
P17: "Header, 7-Pin", LatestRevisionDate=17-Jul-2002, LatestRevisionNote="Re-released for DXP Platform.", Publisher="Altium Limited"
P18: "Header, 9-Pin", LatestRevisionDate=17-Jul-2002, LatestRevisionNote="Re-released for DXP Platform.", Publisher="Altium Limited"
Q1 Q2 Q3 Q4 Q5: library part NMOS-200MA-0001, "MOSFET N-CH 60V 200MA SOT23", Manufacturer=Toshiba, Package=SOT-23-3, Assembled?=no, FET type=N-Channel, Id-Continuous=200mA, Manufacturer Part Number=T2N7002AK,LM, Rds On-Max=3.9Ohm, VDS-Max=60V, Vgs-Max=20V
Q6: library part NMOS-60A-0001, "N-Channel 60 V 60A (Tc) 81W (Tc) Surface Mount 8-SOP Advance (5x5)", Drain Current=60A, Package=8-PowerVDFN, Vdss=60V, Vgs="2.5V @ 220uA", Vgs(Max)=20V
R1 R11: library part RES-2.15M-0001, "2.15 MOhms ±1% 0.1W, 1/10W Chip Resistor 0603 (1608 Metric) Moisture Resistant Thick Film", Package Size=0603, Power="1/10 W", Resistance="2.15 MOhm", Tolerance=+/-1%, Assembled?=No
R2 R8 R13 R17 R23 R49: library part RES-100K-0003, "100 kOhms ±1% 0.1W, 1/10W Chip Resistor 0603 (1608 Metric) Moisture Resistant Thick Film", Package Size=0603, Power="1/10 W", Resistance="100 kOhm", Tolerance="+/- 1%", Assembled?=No
R3: library part RES-120-0002, "120 Ohms ±1% 0.5W, 1/2W Chip Resistor 1206 (3216 Metric) Thick Film", Package Size=1206, Power="0.5 W", Resistance="120 Ohm", Tolerance=1%
R5 R16: library part RES-76.8K-0001, "76.8 kOhms ±1% 0.1W, 1/10W Chip Resistor 0603 (1608 Metric) Moisture Resistant Thick Film", Manufacturer=Yageo, Package Size=0603, Power="1/10 W", Resistance="76.8 kOhm", Tolerance="+/- 1%"
R6 R10 R29: library part RES-100-0002, "100 Ohms ±1% 0.1W, 1/10W Chip Resistor 0603 (1608 Metric) Automotive AEC-Q200 Thick Film", Manufacturer=YAGEO, Package Size=0603, Power Rating=1/10W, Resistance=100Ohm, Assembled?=no, Manufacturer Part Number=AC0603FR-10100RL
R7 R12 R14 R20 R27 R30 R34 R35 R38 R40: library part RES-10K-0002, "RES SMD 10K OHM 1% 1/10W 0603", Manufacturer=YAGEO, Package Size=0603, Power Rating=1/10W, Resistance="10kOhm +/-1%", Assembled?=no, Manufacturer Part Number=RC0603FR-0710KP
R9: library part RES-4.32K-0001, "4.32 kOhms ±1% 0.1W, 1/10W Chip Resistor 0603 (1608 Metric) Moisture Resistant Thick Film", Package Size=0603, Power="1/10 W", Resistance="4.32 kOhm", Tolerance=+/-1%, Assembled?=No
R15 R33 R36: library part THERM-47K-0001, "PTC Thermistor 47 kOhms 0402 (1006 Metric)", Manufacturer="Texas Instruments", Package Size=0402, Resistance=47k, Manufacturer Part Number=TMP6431DECR
R18 R28: library part RES-9.09K-0001, "9.09 kOhms ±1% 0.1W, 1/10W Chip Resistor 0603 (1608 Metric) Moisture Resistant Thick Film", Package Size=0603, Power="1/10 W", Resistance="9.09 kOhm", Tolerance=+/-1%, Assembled?=No
R19 R48: library part RES-200K-0001, "200 kOhms ±1% 0.1W, 1/10W Chip Resistor 0603 (1608 Metric) Automotive AEC-Q200 Thick Film", Manufacturer="Panasonic Electronic Components", Package Size=0603, Power Rating="0.1 W", Resistance="200k +/- 1%", Assembled?=Yes, MFP=ERJ-3EKF2003V
R21: library part RES-1K-0002, "1 kOhms ±1% 0.1W, 1/10W Chip Resistor 0603 (1608 Metric) Thin Film", Manufacturer=YAGEO, Package Size=0603, Power Rating=1/10W, Resistance="1kOhm +/-1%", Assembled?=no, Manufacturer Part Number=RT0603FRE131KL
R22: library part RES-15K-0001, "15 kOhms ±1% 0.1W, 1/10W Chip Resistor 0402 (1005 Metric) Automotive AEC-Q200 Thick Film", Power="1/10 W", Res="15K +/- 1%"
R24: library part RES-10K-0002, "RES SMD 10K OHM 1% 1/10W 0603", Manufacturer=YAGEO, Package Size=0603, Power Rating=1/10W, Resistance=10kOhm, Assembled?=no, Manufacturer Part Number=RC0603FR-0710KP
R25: library part RES-110K-0001, "110 kOhms ±1% 0.1W, 1/10W Chip Resistor 0603 (1608 Metric) Moisture Resistant Thick Film", Package Size=0603, Power="1/10 W", Resistance="110 kOhm", Tolerance="+/- 1%", Assembled?=No
R26: library part THERM-47K-0001, "PTC Thermistor 47 kOhms 0402 (1006 Metric)", Manufacturer="Texas Instruments", Package Size=0402, Resistance="47k +/- 1%", Manufacturer Part Number=TMP6431DECR
R31: library part RES-30.9K-0001, "30.9 kOhms ±1% 0.1W, 1/10W Chip Resistor 0603 (1608 Metric) Moisture Resistant Thick Film", Package Size=0603, Power="1/10 W", Resistance="30.9 kOhm", Tolerance=1%, Assembled?=No
R32: library part RES-4.7K-0002, "RES SMD 4.7K OHM 1% 1/10W 0603", Manufacturer=YAGEO, Package Size=0603, Power Rating=1/10W, Resistance=4.7kOhm, Assembled?=no, Manufacturer Part Number=AF0603FR-074K7L
R37: library part RES-220-003, "220 Ohms ±5% 0.1W, 1/10W Chip Resistor 0603 (1608 Metric) Automotive AEC-Q200, Moisture Resistant Thick Film", Package Size=0603, Power="1/10 W", Resistance="220 Ohm", Tolerance="+/- 5%"
R39: library part RES-73.2K-0001, "73.2 kOhms ±1% 0.1W, 1/10W Chip Resistor 0603 (1608 Metric) Moisture Resistant Thick Film", Package Size=0603, Power="1/10 W", Resistance="73.2 kOhm", Tolerance=1%, Assembled?=No
R41: library part RES-4.7K-0001, "RES SMD 4.7K OHM 1% 1/16W 0402", Manufacturer=YAGEO, Package Size=0402, Power Rating=1/16W, Resistance=4.7k, Assembled?=no, Manufacturer Part Number=RC0402FR-074K7P
R44 R45 R46 R47: library part RES-4.7K-0001, "RES SMD 4.7K OHM 1% 1/16W 0402", Manufacturer=YAGEO, Package Size=0402, Power Rating=1/16W, Resistance="4.7kOhm +/-1%", Assembled?=no, Manufacturer Part Number=RC0402FR-074K7P
TP1 TP2 TP3 TP4 TP5 TP6 TP7 TP8 TP9 TP10 TP11 TP12 TP13 TP14 TP15 TP16 TP17 TP18 TP19 TP20 TP21 TP22 TP23 TP24 TP25 TP26 TP27 TP28 TP29 TP30 TP31 TP32 TP33: library part TEST-POINT-0001, "Oranange PC Test Point, Miniature Phoisphor Bronze Silver Plating Through Hole Mounting Type"
U0 U2: library part IC-BUCK-0006, "Buck Switching Regulator IC Positive Adjustable 1V 1 Output 5A 30-WFQFN Exposed Pad", Current=5A, Manufacturer="Texas Instruments", Package=30-WFQFN, Assembled?=no, Manufacturer Part Number=LM76005RNPR, Type=Buck
U3: library part IC-BUCK-0007, "Buck Switching Regulator IC Positive Adjustable 1V 1 Output 2A 8-PowerSOIC (0.154\", 3.90mm Width)", Current=2A, Manufactuer="Texas Instruments", Package=8-PowerSOIC, Assembled?=no, Manufacturer Part Number=LMR38020SDDAR, Type=Buck
U4: library part IC-LDO-5V-0003, "Linear Voltage Regulator IC Positive Fixed 1 Output 500mA SOT-223-4", Current="500 mA", Manufacturer="Texas Instruments", Package Size=SOT223-4, Assembled?=no, Manufacturer Part Number=UA78M05IDCYR, Type="Low dropout (LDO)"
U5: library part IC-LDO-3.3V-0002, "Linear Voltage Regulator IC Positive Fixed 1 Output 500mA SOT-223-4", Current="500 mA", Package=SOT-223-4, Vin=25V, Vout=3.3V
U6: library part IC-BUCK-0010, "Buck Switching Regulator IC Positive Adjustable 0.8V 1 Output 3A SOT-583", Current=3A, Manufacturer="Texas Instruments", Assembled?=no, Manufacturer Part Number=TPS62933ODRLR, Type=Buck
U7: library part IC-BUCK-0008, "Buck Switching Regulator IC Positive Adjustable 0.6V 1 Output 3A SOT-583", Current=3A, Manufacturer="Texaas Instruments", Package Size=SOT-583, Assembled?=no, Manufacturer Part Number=TPS563212DRLR, Type=Buck
U8: library part IC-STM32G431CBU6, "128KB 1.71V~3.6V ARM-MSeries 32KB 170MHz FLASH 42 UFQFPN-48(7x7) Microcontroller Units (MCUs/MPUs/SOCs) ROHS", Package=UFQFPN-48, Assembled?=no, Manufacturer Part Number=STM32G431CBU6
U9 U10 U11 U12: library part IC-CURRENT-0004, "Current Sensor 1 Channel Hall Effect Bidirectional 8-SOIC (0.154\", 3.90mm Width)", Supply Voltage=5V, Assembled?=No
U13: library part IC-CAN-TRANSCEIVER-0002, "1/1 Transceiver CANbus 8-VSON (3x3)", Manufacturer="Texas Instrument", CAN Capability=FD-CAN, Manufacturer Part Number=TCAN1042HGDRBTQ1
X1: library part "Micro-Fit Molex 2 Pin Vertical", Package=43650-0215, DeviceName=43650-0215, DeviceSetName=HEADER_POS2_?, GateName_1=G$1, LibraryName=con-molex-micro-fit-3_0_2, SymbolName_1=HEADER_POS2
X2 X3 X4 X5: library part "Micro-Fit Molex 4 Pin Vertical", Package=43650-0415, DeviceName=43650-0415, DeviceSetName=HEADER_POS4_?, GateName_1=G$1, LibraryName=con-molex-micro-fit-3_0_2, SymbolName_1=HEADER_POS4

## Via types
v1: diameter 20, hole 10, Top Layer to Bottom Layer, 59 vias
v2: diameter 17.72, hole 7.87, Top Layer to Bottom Layer, 56 vias
v3: diameter 11.81, hole 7.87, Top Layer to Bottom Layer, 24 vias

## Nets (pads, with @x,y where several pads share a name; then routed paths per layer and width w, separated by ;. In a path a pad name is that pad's centre, name@x,y a point inside that pad or via, vN(x,y) a via of type N, cw(c..) or ccw(c..) an arc to the next point about the centre after c; other vN are vias at no path point)
3V3_BUCK_MAIN: C102.1 C103.1 C104.1 C105.1 C106.1 C107.1 C108.1 P9.3 TP23.1 U11.3 U11.4 X4.P$1 X4.P$2 | length 3319.8
  Top Layer w50: v1(3133.86,2578.74) 3204.72,2507.87 3535.43,2507.87 4039.37,2003.94 4515.75,2003.94 4519.69,2000
  Bottom Layer w50: P9.3@1521.26,2614.17 1521.61,2614.52 2661.76,2614.52 2736.22,2688.98 3023.62,2688.98 v1@3137.41,2575.19
3V3_BUCK_OUT: C101.1 C109.1 L4.2 R29.1 R30.1 R31.1 R32.1 U11.1 U11.2 | length 1635.3
  Top Layer w10: C109.1@3909.45,2322.83 R30.1@3909.45,2385.83 4137.8,2385.83 L4.2@4173.23,2421.26 4283.46,2421.26 4374.02,2511.81 4374.02,2771.18 4212.32,2932.87 C101.1@4148.31,2932.87 ; R31.1@4213.31,2932.87 4381.69,2932.87 R32.1@4385.83,2937.01 4385.83,2937.99 4420.28,2972.44 R29.1@4699.8,2972.44
3V3_CURR: U8.11 U11.7 | length 7197.3
  Top Layer w10: v2(468.5,2082.68) 917.32,2082.68 948.82,2051.18 U8.11@948.82,2028.39 ; U11.7@4508.31,2631.61 4508.31,2697.28 v2(4523.62,2712.6)
  Bottom Layer w10: v2(468.5,2082.68) 372.5,1986.67 372.5,1181.97 374.02,1180.45 374.02,1114.17 767.72,720.47 2818.9,720.47 2910.35,811.93 2951.31,811.93 2971.54,832.15 2971.54,904.61 4708.66,2641.73 4708.66,2700.79 4696.85,2712.6 v2(4523.62,2712.6)
3V3_EXT: P8.1 TP28.1 | length 174
  Top Layer w10: P8.1@1621.26,2448.82 TP28.1@1795.28,2448.82
3V3_LDO_OUT: C88.1 C89.1 C90.1 C91.2 C92.1 P9.1 TP20.1 U5.3 | length 76.5
  Top Layer w5: TP20.1@1200.31,3041.57 1245.83,3041.57 1267.72,3019.68